# EAGLE board rj_11_v3 (EAGLE 7.6.0)
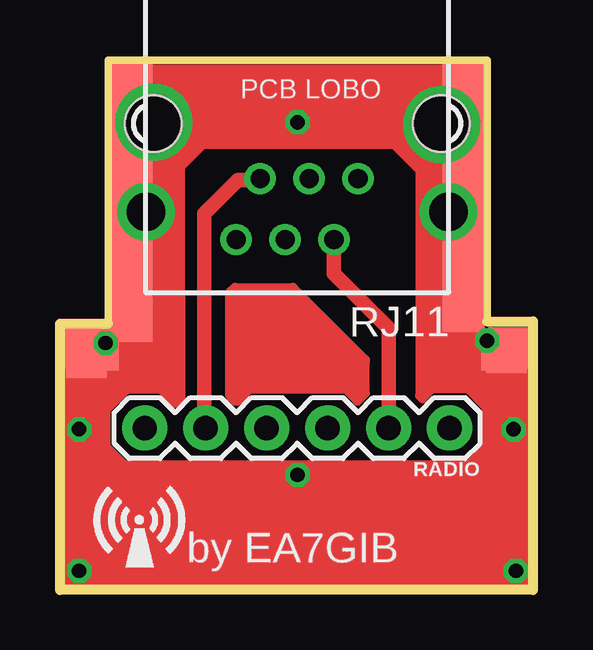
[diagram p0: board, top side]
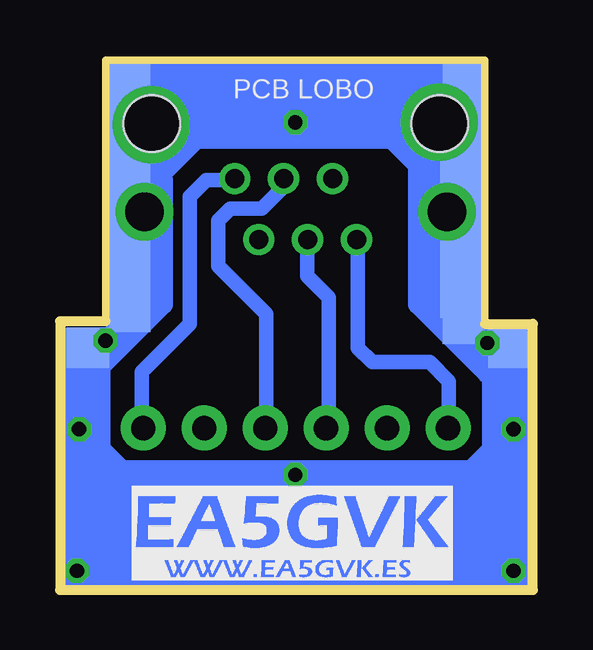
[diagram p1: board, bottom side, seen from below]

Size 19.7 x 22.1 mm. Coordinates in mm from the lower left corner, seen from the top.
Outline: 2,11.1 2,22.1 17.8,22.1 17.8,11.2 19.7,11.2 19.7,0 0,0 0,11.1 2,11.1
Copper layers (1*16): Top 0.035mm / dielectric 1.5mm / Bottom 0.035mm
Design rules "default": minimum track width 10mil, minimum drill 24mil, track to track 8mil, track to pad 8mil, pad to pad 8mil, via to via 8mil, smd to smd 8mil, copper to edge 40mil, drill to drill 8mil, minimum pad ring 10mil, minimum via ring 8mil, stop-mask expansion 4mil, vias tented up to drill 0mil, thermal gap 10mil

## Footprints (pad centres in the part's own frame; a part is rotated, then mirrored left to right if it is on the bottom)
TP17SQ = smd 1.7 x 1.7: TP 0,0
1X06 = drill 1.016 pad 1.88: 1 0,0; 2 2.54,0; 3 5.08,0; 4 7.62,0; 5 10.16,0; 6 12.7,0
YH-55-10 = drill 0.8 pad 1.3: 1 -2.54,2.3; 2 -1.54,4.84; 3 -0.5,2.3; 4 0.5,4.84; 5 1.54,2.3; 6 2.54,4.84 | drill 1.6 pad 2.184: S1 -6.3,3.68; S2 6.3,3.68 | hole 2.36: -6,0; 6,0

## Placement (x,y rotation side)
E$1  [RF2]  0.8,0.7 0 top
E$2  [TP17SQ]  1.1,9.7 0 top
E$3  [TP17SQ]  1,10.1 0 top
E$4  [TP17SQ]  3,21.1 0 top
E$5  [TP17SQ]  3,19.9 0 top
E$6  [TP17SQ]  3,18.8 0 top
E$7  [TP17SQ]  3,17.8 0 top
E$8  [TP17SQ]  3,16.8 0 top
E$9  [TP17SQ]  3,15.8 0 top
E$10  [TP17SQ]  3,14.8 0 top
E$11  [TP17SQ]  3,13.6 0 top
E$12  [TP17SQ]  3,12.8 0 top
E$13  [TP17SQ]  3,12.1 0 top
E$14  [TP17SQ]  3,11.2 0 top
E$15  [TP17SQ]  16.8,21.1 0 top
E$16  [TP17SQ]  16.8,19.9 0 top
E$17  [TP17SQ]  16.8,18.5 0 top
E$18  [TP17SQ]  16.8,17.3 0 top
E$19  [TP17SQ]  16.8,16.1 0 top
E$20  [TP17SQ]  16.8,15.2 0 top
E$21  [TP17SQ]  16.8,14.3 0 top
E$22  [TP17SQ]  16.8,13.3 0 top
E$23  [TP17SQ]  16.8,12.7 0 top
E$24  [TP17SQ]  16.8,11.9 0 top
E$25  [TP17SQ]  16.8,11.6 0 top
E$26  [TP17SQ]  18.7,10.1 0 top
E$27  [TP17SQ]  18.4,10 0 top
E$28  [TP17SQ]  18.6,9.9 0 top
E$29  [TP17SQ]  1,10.1 0 top
E$30  [TP17SQ]  1.4,10.1 0 top
E$31  [TP17SQ]  1.6,10 0 top
E$32  [TP17SQ]  1.6,10.1 0 top
E$33  [TP17SQ]  2.9,21.1 0 bottom
E$34  [TP17SQ]  3,19.9 0 bottom
E$35  [TP17SQ]  3,18.3 0 bottom
E$36  [TP17SQ]  3,17.2 0 bottom
E$37  [TP17SQ]  3,16 0 bottom
E$38  [TP17SQ]  3,14.6 0 bottom
E$39  [TP17SQ]  3,13.5 0 bottom
E$40  [TP17SQ]  3,12.2 0 bottom
E$41  [TP17SQ]  2.9,11.1 0 bottom
E$42  [TP17SQ]  1,10.1 0 bottom
E$43  [TP17SQ]  1.5,10.1 0 top
E$44  [TP17SQ]  16.8,21.1 0 bottom
E$45  [TP17SQ]  16.8,20.1 0 bottom
E$46  [TP17SQ]  16.8,19.2 0 bottom
E$47  [TP17SQ]  16.8,18.2 0 bottom
E$48  [TP17SQ]  16.8,17.1 0 bottom
E$49  [TP17SQ]  16.8,16.4 0 bottom
E$50  [TP17SQ]  16.8,15.3 0 bottom
E$51  [TP17SQ]  16.8,14.1 0 bottom
E$52  [TP17SQ]  16.8,13.2 0 bottom
E$53  [TP17SQ]  16.8,11.6 0 bottom
E$54  [TP17SQ]  18.5,10.1 0 bottom
E$55  [TP17SQ]  18.6,10.1 0 bottom
E$56  [EA5GVK1]  16.7,0.4 0 bottom
RADIO  [1X06]  16.23,6.75 180 top
RJ11  [YH-55-10]  9.88,19.45 180 top

## Library data of the parts
E$1 = LOGOS_BLAS
E$2-E$55 = testpad
E$56 = LOGOS_BLAS1
RADIO = SparkFun-Connectors
RJ11 = con-wenzhou-yihua

## Tracks (layer width: path | path; a pad name or v marks a point on that pad's centre or on a via)
S$1
  Bottom 0.61: 12.5,17.1 13.6,17.1 14.3,16.4 14.3,11.1 16.3,9.1 16.3,7.1
S$2
  Top 0.61: 13.7,6.8 13.7,9.8
S$3
  Bottom 0.61: 10.5,16.7 11.3,15.9 12.6,15.9 13.1,15.4 13.1,13.5 11.1,11.5 11.1,6.7
S$4
  Bottom 0.61: 8.5,6.9 8.5,12.2 9.4,13.1 9.4,14.4 9.5,14.5
S$5
  Top 0.61: 6,6.9 6,15.7 7.4,17.1 8.3,17.1
S$6
  Bottom 0.61: 7.3,14.7 7.3,10.1 6.7,9.5 4.3,9.5 3.5,8.7 3.5,6.9 3.4,6.8
S$7  (via drill 2.2)
  other vias: 15.9,19.4
S$8  (via drill 2.2)
  other vias: 3.9,19.5
S$9
  Bottom 0.406: 3.2,12.2 3.5,12.3 3.5,19.3
  Bottom 0.61: 16.1,15.5 16.1,19.2 15.7,19.6 3.8,19.6 3.5,19.3 3.5,15.8
S$10
  Bottom 0.406: 17.3,12.1 15.3,12.2 15.3,19.4
S$11  (via drill 0.6)
  other vias: 9.9,19.5 1.9,10.3 17.8,10.4 9.9,4.8 0.8,0.8 19,0.8 0.8,6.7 18.9,6.7
S$12
  Bottom 0.813: 1.5,9 1.5,6.1 2.8,4.8
S$13
  Bottom 0.813: 18.2,6.9 18.2,6.1 17.2,5.1
S$14
  Top 0.813: 1.6,9.3 1.6,6 2.7,4.9
S$15
  Top 0.61: 13.7,6.7 13.7,10.9 11.4,13.2 11.4,14.4
S$16
  Top 0.813: 3.4,14.2 3.4,13.9 4.8,12.5 4.8,11.9 1.9,9 1.9,9.6 4.2,11.9 3.1,11.9 2,10.8
S$17
  Bottom 0.813: 3.1,11.6 4.1,12.6 4.1,12.2 1.9,10 1.9,10.6 3.3,12 4.6,12 4.8,12.2 4.8,11.9 1.9,9
S$18
  Top 0.813: 17.3,11.8 17.3,10.1 18.2,9.2 18.1,9.2 15.4,11.9 16.3,11.9 16.9,11.3 16.9,11.8 16.7,12
  Bottom 0.813: 16.5,14.5 16.5,13.5 15.4,12.4 15.4,12 17.8,9.6 17.8,10.3 16.2,11.9 16.9,11.3 17.8,10.4 17.6,10.4 17.1,11.5
S$19
  Top 0.406: 15,17.8 15,8.1 15.1,8 16.1,9 | 16.1,9 17.1,10 | 16.1,9 16.4,9 18.3,7.1 18.3,7.5 17.6,8.2 17.6,9.1 17.5,9.2 | 17.5,9.2 15.6,11.1 15.6,10.7 | 15.6,9.4 15.6,9 17.3,9 | 17.5,9 17.3,9 | 17.3,9 15.6,10.7 | 15.6,10.7 15.6,9.4 | 15.6,9.4 15.9,9.1 17.4,9.1 17.5,9.2 | 17.5,9.2 16,9.2 15.8,9.4 16.3,9.4 16.4,9.5 16,9.5 15.9,9.6 16.3,9.6 16.4,9.7 15.9,9.7 15.8,9.8 16,9.8 | 16.2,9.8 16,9.8 | 16,9.8 15.8,10 16,10 16.1,10.1 15.9,10.1 15.8,10.2
  Top 0.813: 12.3,19.6 13.2,19.6 15,17.8 16.1,16.7 | 18.3,8.1 18.3,7.1 18.3,6.2 17.2,5.1
S$20
  Top 0.813: 7.7,19.5 6.6,19.5 4.6,17.5
S$21
  Bottom 0.813: 6.5,19.7 6.5,19.4 4.8,17.7 4.8,18 6.7,19.9 12.9,19.9 16,16.8 15.7,16.8 15.4,17.1 15.4,11.9 18.1,9.2
S$22
  Bottom 0.813: 3.2,15.1 3.2,12.6
S$23
  Top 0.813: 3,12.3 2.9,12.3 2.5,11.9
S$24
  Top 0.406: 3.5,12.3 5,12.3 5,8 4.8,7.8 3.7,8.9 | 3.7,8.9 2.7,9.9 2.7,8.3 | 2.7,8.3 1.7,7.3 1.7,7.6 2.4,8.3 2.7,8.3 | 2.7,8.3 2.8,8.4 4.5,8.4 4.6,8.3 | 4.6,8.3 4.7,8.2 4.7,11.3 4.8,11.4 4.8,11.2 1.9,8.3 2,8.3 2.3,8.6 4.2,8.6 4.3,8.7 4.3,10.2 | 4.3,10.2 4.6,10.5 | 4.3,10.2 3,8.9 3.7,8.9 | 3.7,8.9 3.7,9.3 | 3.7,9.3 4.1,9.7 | 3.7,9.3 3.4,9 3.8,9 4,9.2 4,9.4 4.1,9.5 4.1,9 4,8.9 | 4.6,8.3 4.6,11.4
S$25
  Top 0.406: 18.7,8.4 17.7,8.4 | 17.7,8.4 15.3,8.4 15.2,8.3 15.2,11.4 15.3,11.5 15.3,8.9 15.5,8.7 17.4,8.7 17.7,8.4
S$26
  Top 0.406: 7.8,8.8 11.5,8.8 12.4,7.9 12.7,8.2 12.7,9.5 10.1,12.1 10.1,10.4 10.3,10.2 11.6,10.2 12.4,9.4 12.4,8.4 12.3,8.3 12.3,8.6 12.1,8.8 12.1,9.3 11.9,9.5 11.9,8.8 12.1,8.6 12.1,9.8 10.4,11.5 10.4,10.6 10.8,10.6 | 11.2,10.6 10.8,10.6 | 10.8,10.6 10.6,10.8 10.9,10.8 11,10.7
S$27
  Top 0.406: 11.6,8.8 8.3,8.8 7.4,7.9 7.3,7.9 7.1,8.1 7.1,12.4 7.3,12.6 9.7,12.6 12.7,9.6 12.5,9.6 9.8,12.3 7.5,12.3 7.4,12.4 7.4,8.2
(copper drawn outside any net)
  shapes: Bottom area x11, Top area x10

## Text on the board
tPlace: PCB LOBO | by EA7GIB
bPlace: PCB LOBO